# Altium PCB powerPCB.PcbDoc
Units mil, origin at the board's own origin, x right, y up, seen from the top; angles counter-clockwise.
Board outline 2085 x 2875 mil, 2 copper layers (Top Layer, Bottom Layer), stack 65.792 mil thick; 13 components, 21 nets, 96 pads, 6 vias.
Unrouted connection lines stored in the file: 1.
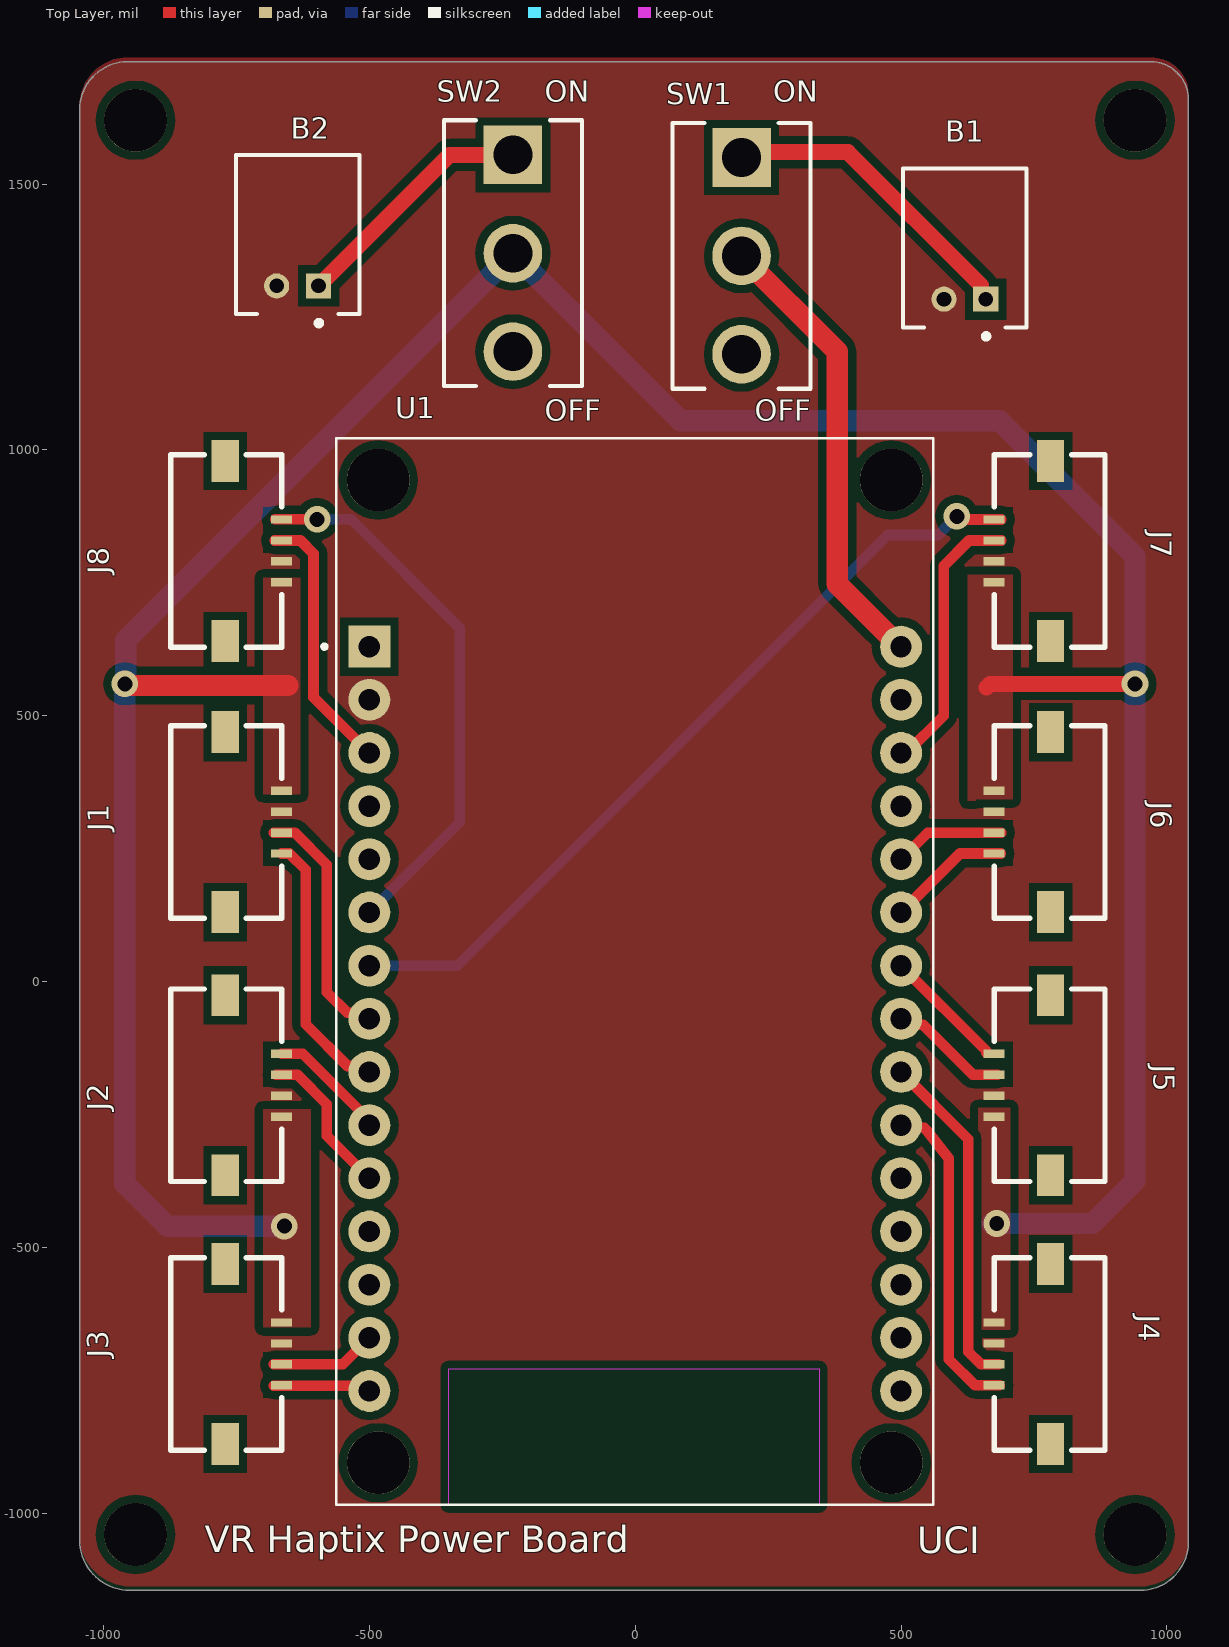
[diagram p0: Top Layer view]
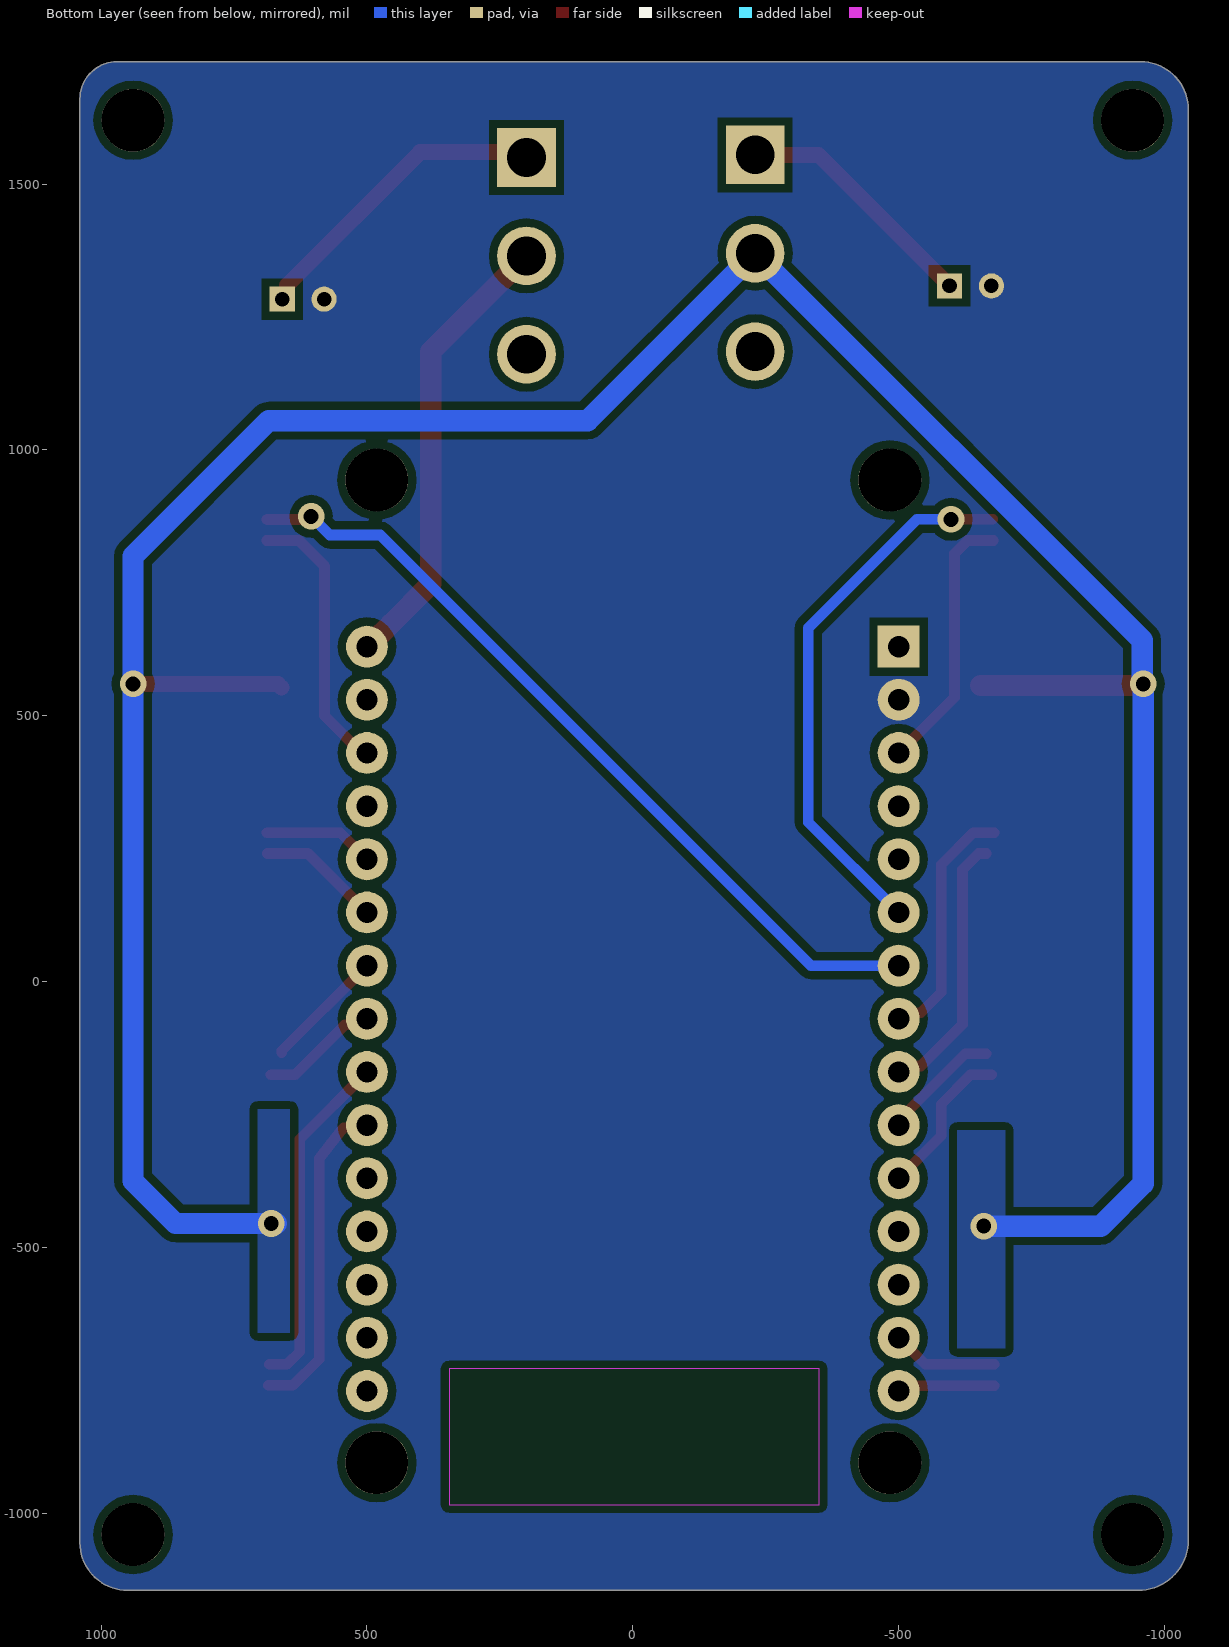
[diagram p1: Bottom Layer view, seen from below]
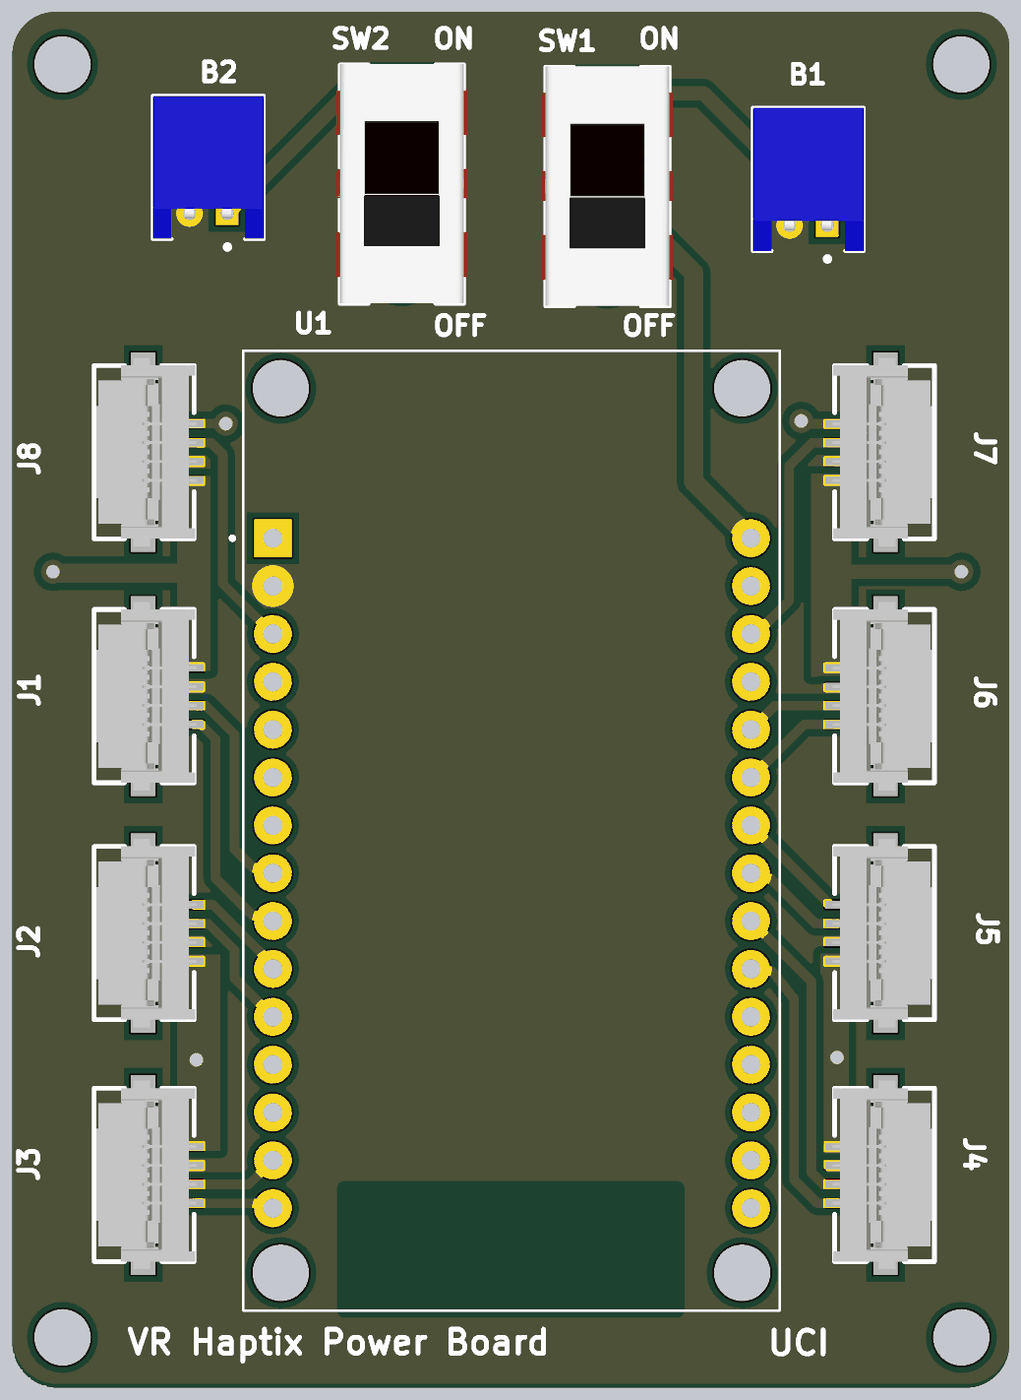
[diagram p2: 3D render of the assembled board from above, using the file's embedded part models]

## Layer stack, top to bottom
Top Solder: solder mask 0.4, Solder Resist, Dk 3.5
Top Layer: signal copper 1.4
Dielectric 1: core 62.9921, FR-4, Dk 4.8
Bottom Layer: signal copper 1.4
Bottom Solder: solder mask 0.4, Solder Resist, Dk 3.5

## Board outline
-1045,-1050 -1045,1640 cw(c-955,1640) -955,1730 970,1730 cw(c970,1660) 1040,1660 1040,-1055 cw(c950,-1055) 950,-1145 -950,-1145 cw(c-950,-1050)

## Design rules (kind name [scope] priority, off if disabled: settings)
Clearance [All] p1: gap=15 ignorepadtopadclearanceinfootprint=FALSE
HoleSize [All] p1: absolutevalues=TRUE maxlimit=99999 minlimit=1 maxpercent=80.000 minpercent=20.000
PolygonConnect [All] p1: connectstyle=Direct reliefconductorwidth=10 reliefentries=4 polygonreliefangle="90 Angle" airgapwidth=10
RoutingVias [All] p1: holewidth=28 width=50 viastyle="Through Hole" minholewidth=28 minwidth=50 maxholewidth=28 maxwidth=50
SilkToSolderMaskClearance [IsPad] p1: minsilkscreentomaskgap=8 clearancetoexposedcopper=TRUE
SolderMaskExpansion [All] p1: expansion=4 istentingtop=FALSE
Width [All] p1: maxlimit=100 minlimit=10 preferedwidth=10
28 further rules are at their usual default settings.

## Classes and differential pairs
component class powerPCB: B2 J1 J2 J3 J4 J5 J6 J7 J8 SW1 SW2 U1

## Components (designator, comment, footprint, x,y, rotation, side; value= is the part's Value field where it differs from the comment)
B1 "S2B-PH-K-S(LF)(SN)" JST-S2B-PH-K-S_V 620,1380 r180 top
B2 "S2B-PH-K-S(LF)(SN)" JST-S2B-PH-K-S_V -635,1405 r180 top
J1 "200528-0040" 200528-0040#1 -665,300 r270 top
J2 "200528-0040" 200528-0040#2 -665,-195 r90 top
J3 "200528-0040" 200528-0040#1 -665,-700.32 r270 top
J4 "200528-0040" 200528-0040#2 675,-700.32 r270 top
J5 "200528-0040" 200528-0040#1 675,-195 r90 top
J6 "200528-0040" 200528-0040#2 675,300 r270 top
J7 "200528-0040" 200528-0040#1 675,810 r90 top
J8 "200528-0040" 200528-0040#2 -665,810 r90 top
SW1 "1101M2S3CGE2" FP-1101M2S3CGE2-MFG 200,1364.96 r0 top
SW2 "1101M2S3CGE2" FP-1101M2S3CGE2-MFG -230,1369.96 r0 top
U1 "ESP32-DEVKIT-V1" MODULE_ESP32_DEVKIT_V1 0,19.17 r0 top

## Footprints (in the part's own frame and the unit in brackets; to place one, negate y for a bottom-side part, rotate by r counter-clockwise, add the part's x,y. Pads: shape width x height; smd on the part's side, far side on the other; paste and mask are expansions set on the pad)
200528-0040#1 [mm]
  rect 0.4x1 smd: 1(-1.5,0) 2(-0.5,0) 3(0.5,0) 4(1.5,0)
  rect 2x1.3 smd: 5(-4.3,-2.7) 6(4.3,-2.7)
  silkscreen extent -4.6,-5.3 4.6,0, body extent -5,-5.18 5,0.12, height 1.96
200528-0040#2 [mm]
  rect 0.4x1 smd: 1(-1.5,0) 2(-0.5,0) 3(0.5,0) 4(1.5,0)
  rect 2x1.3 smd: 5(-4.3,2.7) 6(4.3,2.7)
  silkscreen extent -4.6,0 4.6,5.3, body extent -5,-0.12 5,5.18, height 1.96
FP-1101M2S3CGE2-MFG [mm]
  rect 2.8x2.8 hole 1.85 paste-2539.97 mask+0: 1(0,4.7)
  round 2.8 hole 1.85 paste-2539.97 mask+0: 2(0,0) 3(0,-4.7)
  silkscreen extent -3.3,-6.35 3.3,6.35, body extent -3.4,-6.45 3.4,6.45, height 0.25
JST-S2B-PH-K-S_V [mm] "THD, 2-Leads, Body 7.6x5.9mm, Pitch 2mm"
  rect 1.2x1.2 hole 0.7: 1(-1,2.45)
  round 1.2 hole 0.7: 2(1,2.45)
  silkscreen extent -2.95,-3.8 2.95,4.35, body extent -2.95,-3.8 2.95,3.8, height 4.8
MODULE_ESP32_DEVKIT_V1 [mm]
  rect 2x2 / inner round 2 / far side rect 2x2 hole 1.02: 1(-12.7,15.515)
  round 2 hole 1.02: 2(-12.7,12.975) 3(-12.7,10.435) 4(-12.7,7.895) 5(-12.7,5.355) 6(-12.7,2.815) 7(-12.7,0.275) 8(-12.7,-2.265) 9(-12.7,-4.805) 10(-12.7,-7.345) 11(-12.7,-9.885) 12(-12.7,-12.425) 13(-12.7,-14.965) 14(-12.7,-17.505) 15(-12.7,-20.045) 16(12.7,-20.045) 17(12.7,-17.505) 18(12.7,-14.965) 19(12.7,-12.425) 20(12.7,-9.885) 21(12.7,-7.345) 22(12.7,-4.805) 23(12.7,-2.265) 24(12.7,0.275) 25(12.7,2.815) 26(12.7,5.355) 27(12.7,7.895) 28(12.7,10.435) 29(12.7,12.975) 30(12.7,15.515)
  round 3 hole 3 unplated: ""(-12.28,-23.475) ""(-12.28,23.475) ""(12.23,-23.475) ""(12.23,23.475)
  Keep-Out Layer region: 8.78,-25.475 -8.91,-25.475 -8.91,-18.985 8.78,-18.985
  Keep-Out Layer region: 8.78,-25.475 -8.91,-25.475 -8.91,-18.985 8.78,-18.985
  silkscreen extent -14.95,-25.48 14.23,25.48

## Part data
B1 B2: library part CMP-1755-00004-1, "Male Header, Pitch 2 mm, 1 x 2 Position, Height 4.8 mm, Tail Length 3.4 mm, -25 to 85 degC, RoHS, Bulk", Capacitance="10 uF", Case\Package=Radial, Max Operating Temperature="85 degC", Min Operating Temperature="-40 degC", Package Quantity=200, Tolerance=20%, Voltage Rating="50 V", ComponentLink1Description=Datasheet, ComponentLink1URL=http://www.jst-mfg.com/product/pdf/eng/ePH.pdf, DatasheetVersion=Dec-12, Diameter="5 mm", Height="11 mm", Lead Pitch="2 mm", Length="11 mm", Mount="Through Hole", PackageDescription="Male Header, Pitch 2 mm, 1 x 2 Position, Height 4.8 mm, Tail Length 3.4 mm", PackageReference=S2B-PH-K-S, Packaging=Bulk, Pins=2, Radiation Hardening=No, REACH SVHC="No SVHC", RoHSCompliant=true, Voltage Rating (DC)="50 V"
J1 J2 J3 J4 J5 J6 J7 J8: "Connector", Manufacturer_Name=Molex, Mouser Part Number=538-200528-0040, Datasheet Link=http://www.molex.com/webdocs/datasheets/pdf/en-us//2005280040_FFC_FPC_CONNECTORS.pdf, Manufacturer_Part_Number=200528-0040, Mouser Price/Stock=https://www.mouser.co.uk/ProductDetail/Molex/200528-0040?qs=IvjI65BR3TWJ39ZrkPFPSw%3D%3D
SW1 SW2: library part CMP-10038-000004-1, "SWITCH SLIDE SPDT 6A 120V", Contact Current Rating=6A, Contact Resistance=10mÎ©, Manufacturer="C&K Components", Temperature="-30Â°C to +65Â°C", Temperature Range High=+65Â°C, Temperature Range Low=-30Â°C, Voltage Rating Ac=120V, Voltage Rating Dc=28V, Automotive=No, Category=Switch, ComponentLink2Description=Datasheet, ComponentLink2URL=https://www.ckswitches.com/media/1429/1000.pdf, Device Class L1=Electromechanical, Device Class L2=Switches, Device Class L3="Slide Switches", Digikey Description="SWITCH SLIDE SPDT 6A 120V", Electromechanical Life=40000Cycles, Height=13.34mm, Lead Free=Yes, Manufacturer Part Number=1101M2S3CGE2, Mount="Through Hole", Mouser Description="Switch Slide ON None ON SPDT Top Slide 6A 250VAC 28VDC 0.4VA PC Pins Thru-Hole Bulk", Octopart=https://octopart.com/1101m2s3cge2-c%26k+components-2817222, Package=1101M2S3CGE2, RoHS=TRUE, Throw Configuration=SPDT
U1: "Dual core, Wi-Fi: 2.4 GHz up to 150 Mbits/s,BLE (Bluetooth Low Energy) and legacy Bluetooth, 32 bits, Up to 240 MHz", Package=None, Availability="Not in stock", Check_prices=https://www.snapeda.com/parts/ESP32-DEVKIT-V1/Do+it/view-part/?ref=eda, MF="Do it", MP=ESP32-DEVKIT-V1, Price=None, SnapEDA_Link=https://www.snapeda.com/parts/ESP32-DEVKIT-V1/Do+it/view-part/?ref=snap

## Free pads (board coordinates)
  round 118.11 hole 118.11 unplated: ""(-940,-1040) ""(-940,1620) ""(940,-1040) ""(940,1620)

## Via types
v1: diameter 50, hole 28, Top Layer to Bottom Layer, tented both sides, 6 vias

## Nets (pads, with @x,y where several pads share a name; then routed paths per layer and width w, separated by ;. In a path a pad name is that pad's centre, name@x,y a point inside that pad or via, vN(x,y) a via of type N, cw(c..) or ccw(c..) an arc to the next point about the centre after c; other vN are vias at no path point)
GND: B1.2 B2.2 J1.2 J2.2 J3.2 J4.2 J5.2 J6.2 J7.2 J8.2 U1.2
NetB1_1: B1.1 SW1.1 | length 588
  Top Layer w30: SW1.1 210,1560 400,1560 650.75,1309.25 650.75,1292.17 B1.1
NetB2_1: B2.1 SW2.1 | length 467.7
  Top Layer w30: B2.1 -349.17,1555 SW2.1
SCL1: J1.4 U1.9 | length 505.4
  Top Layer w20: J1.4 -650.44,240.95 -620,210.5 -620,-80 -541.24,-158.76 -511.24,-158.76 U1.9
SCL2: J2.4 U1.10 | length 225.8
  Top Layer w20: J2.4 -625.09,-135.95 -500,-261.03 U1.10
SCL3: J3.4 U1.15 | length 184.1
  Top Layer w20: J3.4@-680,-760 -510,-760 U1.15
SCL4: J4.4 U1.21 | length 610.8
  Top Layer w20: U1.21 543.49,-275.18 549.23,-280.91 590,-332.7 590,-710 639.53,-759.53 J4.4@685.19,-759.53
SCL5: J5.4 U1.24 | length 230.2
  Top Layer w20: U1.24 660.31,-130.31 J5.4@660.31,-133.82
SCL6: J6.4 U1.25 | length 233.1
  Top Layer w20: U1.25 610.94,240.94 J6.4 J6.4@687.17,240.94
SCL7: J7.4 U1.7 | length 1540.6
  Top Layer w20: v1(605,875) 613.12,875 618.98,869.14 J7.4@688.19,869.14
  Bottom Layer w20: U1.7 -335,30 475,840 570,840 v1(605,875)
SCL8: J8.4 U1.6 | length 1037
  Top Layer w20: J8.4@-677.24,869.73 v1@-598.77,869.73
  Bottom Layer w20: v1(-598.45,869.41) -534.41,869.41 -330,665 -330,300 U1.6
SDA1: J1.3 U1.8 | length 465.7
  Top Layer w20: J1.3@-680,280.32 J1.3 -640.32,280.32 -580,220 -580,-20 -541.24,-58.76 -511.24,-58.76 U1.8
SDA2: J2.3 U1.11 | length 290.8
  Top Layer w20: J2.3@-675.32,-175.32 -635.21,-175.32 -580,-230.53 -580,-290 U1.11
SDA3: J3.3 U1.14 | length 200.7
  Top Layer w20: J3.3@-680,-720 -550,-720 U1.14
SDA4: J4.3 U1.22 | length 645.8
  Top Layer w20: U1.22 626.3,-296.3 626.3,-695.92 650.38,-720 672.68,-720 J4.3@683.93,-720
SDA5: J5.3 U1.23 | length 224.3
  Top Layer w20: U1.23 511.24,-81.24 541.24,-81.24 635.32,-175.32 670,-175.32 J5.3@680.64,-175.32
SDA6: J6.3 U1.26 | length 208.9
  Top Layer w20: U1.26 550,280 595,280 595.31,280.31 J6.3 J6.3@688.02,280.31
SDA7: J7.3 U1.28 | length 518.9
  Top Layer w20: U1.28 510,430 580,500 580,781.81 627.87,829.68 J7.3 J7.3@688.31,829.68
SDA8: J8.3 U1.3 | length 501.7
  Top Layer w20: J8.3@-677.96,829.68 J8.3 -629.69,829.68 -605,805 -605,535 U1.3
VIN1: SW1.2 U1.30 | length 860.4
  Top Layer w40: SW1.2 380,1184.96 380,747.92 455.11,672.8 486.3,641.61 488.39,641.61 U1.30
VIN2: J1.1 J2.1 J3.1 J4.1 J5.1 J6.1 J7.1 J8.1 SW2.2 | length 5854.7
  Top Layer w30: 660.88,553.2 667.67,560 v1(940,560)
  Top Layer w40: v1(-960,560) -958.09,558.09 -951.02,558.09 -949.65,556.72 -653.72,556.72
  Bottom Layer w40: v1@-664.62,-460 -880,-460 -960,-380 v1(-960,560) -958.09,561.91 -958.09,641.87 SW2.2 84.96,1055 685,1055 940,800 v1(940,560) 940,-375 860,-455 v1@670,-455
  other v1: -660,-460 680,-455
pads on no net: J1.5 J1.6 J2.5 J2.6 J3.5 J3.6 J4.5 J4.6 J5.5 J5.6 J6.5 J6.6 J7.5 J7.6 J8.5 J8.6 SW1.3 SW2.3 U1. U1.1 U1.4 U1.5 U1.12 U1.13 U1.16 U1.17 U1.18 U1.19 U1.20 U1.27 U1.29

## Polygon pours and split planes (outlines as drawn)
GND on Top Layer "GND_L01_P012" (solid, remove dead copper, pour order 12): -1044.51,-1042.14 -1044.51,1647.86 cw(c-954.51,1647.86) -954.51,1737.86 970.49,1737.86 cw(c970.49,1667.86) 1040.49,1667.86 1040.49,-1047.14 cw(c950.49,-1047.14) 950.49,-1137.14 -949.51,-1137.14 cw(c-949.51,-1042.14)
VIN2 on Top Layer "VIN2_L01_P000" (solid, remove dead copper, pour order 0): -700,-240 -700,-650.4 -610,-650.4 -610,-240
VIN2 on Top Layer "VIN2_L01_P004" (solid, remove dead copper, pour order 4): 625,765 710,765 710,340 625,340
VIN2 on Top Layer "VIN2_L01_P003" (solid, remove dead copper, pour order 3): -700,760 -630,760 -630,352.31 -700,352.31
VIN2 on Top Layer "VIN2_L01_P002" (solid, remove dead copper, pour order 2): 645,-235 705,-235 705,-655 645,-655
GND on Bottom Layer "GND_L02_P013" (solid, remove dead copper, pour order 13): -1045,-1050 -1045,1640 cw(c-955,1640) -955,1730 970,1730 cw(c970,1660) 1040,1660 1040,-1055 cw(c950,-1055) 950,-1145 -950,-1145 cw(c-950,-1050)
VIN2 on Bottom Layer "VIN2_L02_P009" (solid, pour order 9): 705,-240 705,-660 645,-660 645,-240
VIN2 on Bottom Layer "VIN2_L02_P006" (solid, pour order 6): -610,-280 -700,-280 -700,-690 -610,-690

## Silkscreen, mask and mechanical layers (free items; w line width, h text height)
Top Overlay:
  text "ON" at -170,1655 h40
  text "ON" at 260,1655 h40
  text "OFF" at -170,1055 h40
  text "OFF" at 225,1055 h40
  text "VR Haptix Power Board" at -810,-1073.34 h50
  text "UCI" at 530,-1075 h50
Mechanical 1:
  the board outline again, w10